# Altium PCB PCB.pcbdoc
Units mil, origin at the board's own origin, x right, y up, seen from the top; angles counter-clockwise.
Board outline 4240.23 x 2862.2 mil, 2 copper layers (Top Layer, Bottom Layer); 24 components, 39 nets, 138 pads, 0 vias.
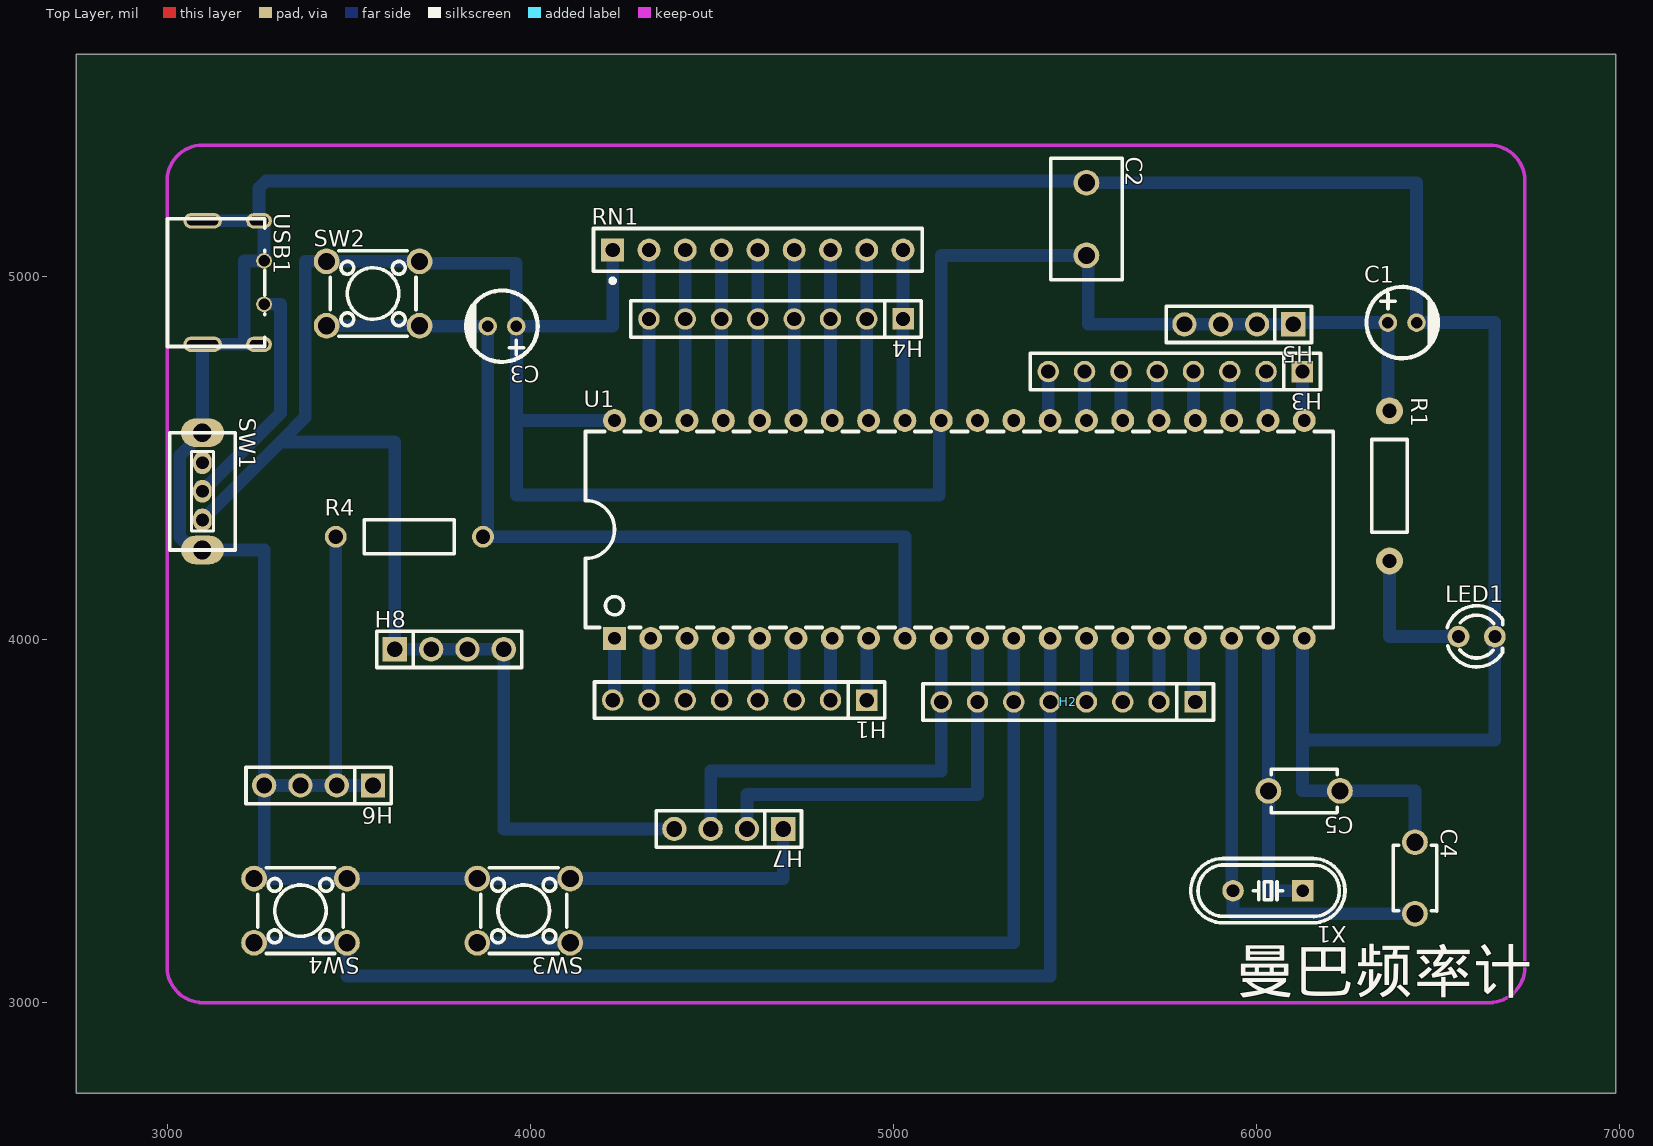
[diagram p0: Top Layer view]
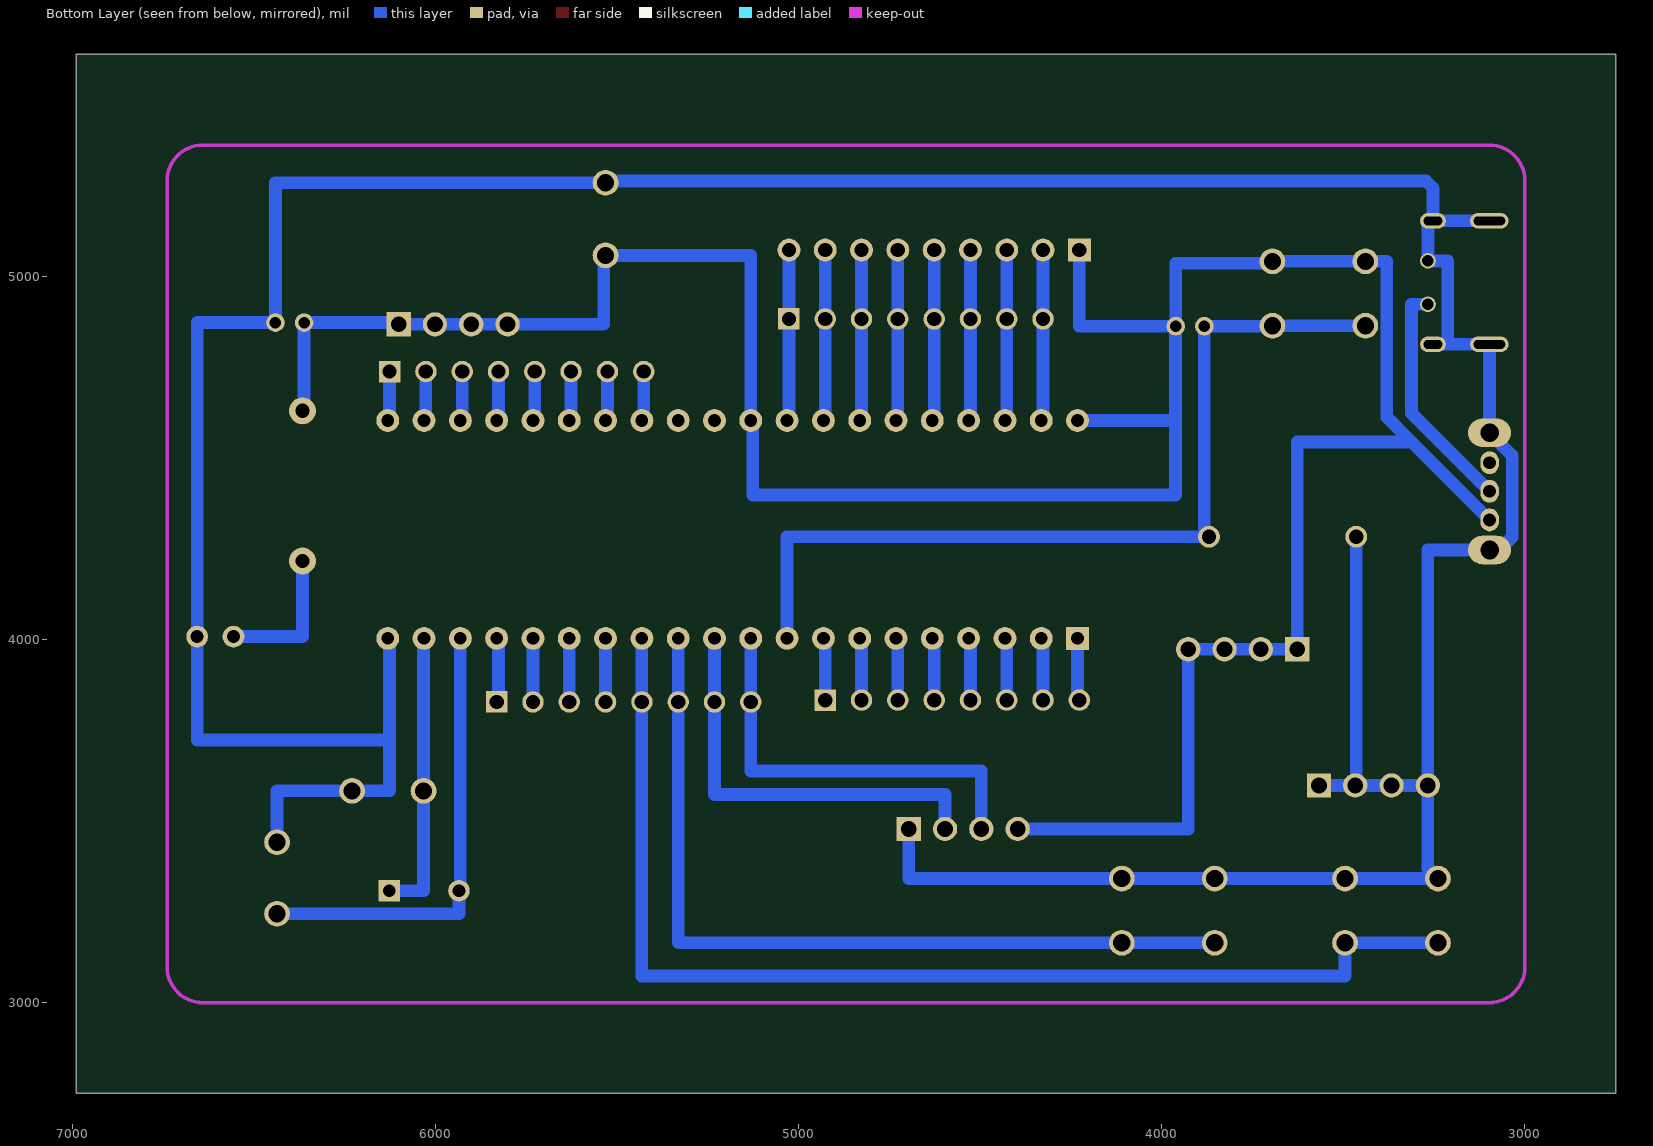
[diagram p1: Bottom Layer view, seen from below]

## Layer stack, top to bottom
Top Layer: signal copper (thickness not stored)
Dielectric: dielectric 12.6, FR-4, Dk 4.8
Bottom Layer: signal copper (thickness not stored)

## Board outline
6990.23,2750 2750,2750 2750,5612.2 6990.23,5612.2

## Design rules (kind name [scope] priority, off if disabled: settings)
BoardOutlineClearance copperThickness1oz [All] p0: genericclearance=10 ignorepadtopadclearanceinfootprint=FALSE except(0: Arc-SplitContinuation Track-SplitContinuation SMDPad-SplitContinuation THPad-SplitContinuation Via-SplitContinuation Fill-SplitContinuation Poly-SplitContinuation Region-SplitContinuation Text-SplitContinuation; 6: SMDPad-CutoutEdge THPad-CutoutEdge Via-CutoutEdge Fill-CutoutEdge Region-CutoutEdge; 11.8: Track-OutlineEdge SMDPad-OutlineEdge THPad-OutlineEdge Via-OutlineEdge Fill-OutlineEdge Region-OutlineEdge Poly-OutlineEdge Text-OutlineEdge Track-CutoutEdge)
BoardOutlineClearance copperThickness2oz [All] p0: genericclearance=10 ignorepadtopadclearanceinfootprint=FALSE except(0: Arc-SplitContinuation Track-SplitContinuation SMDPad-SplitContinuation THPad-SplitContinuation Via-SplitContinuation Fill-SplitContinuation Poly-SplitContinuation Region-SplitContinuation Text-SplitContinuation; 6: Track-CutoutEdge SMDPad-CutoutEdge THPad-CutoutEdge Via-CutoutEdge Region-CutoutEdge; 11.8: Track-OutlineEdge SMDPad-OutlineEdge THPad-OutlineEdge Via-OutlineEdge Fill-OutlineEdge Region-OutlineEdge Poly-OutlineEdge Text-OutlineEdge Fill-CutoutEdge)
Clearance copperThickness1oz [(InNet('+5V') OR InNet('GND') OR InNet('RST') OR InNet('X2') OR InNet('X1') OR InNet('P1.7') OR InNet('P1.6') OR InNet('P1.5') OR InNet('P1.4') OR InNet('P1.3') OR InNet('P1.2') OR InNet('P1.1') OR InNet('P1.0') OR InNet('P3.7') OR InNet('P3.6') OR InNet('P3.5') OR InNet('P3.4') OR InNet('P3.3') OR InNet('P3.2') OR InNet('TXD') OR InNet('RXD') OR InNet('P2.0') OR InNet('P2.1') OR InNet('P2.2') OR InNet('P2.3') OR InNet('P2.4') OR InNet('P2.5') OR InNet('P2.6') OR InNet('P2.7') OR InNet('P0.7') OR InNet('P0.6') OR InNet('P0.5') OR InNet('P0.4') OR InNet('P0.3') OR InNet('P0.2') OR InNet('P0.1') OR InNet('P0.0') OR InNet('$3N2977') OR InNet('VCC'))] p1: gap=7 ignorepadtopadclearanceinfootprint=FALSE except(4: Track-Track; 6: Track-SMDPad SMDPad-SMDPad Track-THPad SMDPad-THPad THPad-THPad Track-Via SMDPad-Via THPad-Via Via-Via Track-Fill SMDPad-Fill THPad-Fill Via-Fill Fill-Fill SMDPad-Region THPad-Region Via-Region Fill-Region Region-Region Track-Poly SMDPad-Poly THPad-Poly Via-Poly Fill-Poly Poly-Poly Track-Text SMDPad-Text THPad-Text Via-Text Fill-Text Region-Text Poly-Text Text-Text; 6.9: Track-Hole SMDPad-Hole THPad-Hole Via-Hole Fill-Hole Region-Hole Poly-Hole Text-Hole Sheet-Hole; 11.8: Track-Region Region-Poly Track-Sheet SMDPad-Sheet THPad-Sheet Via-Sheet Fill-Sheet Region-Sheet Poly-Sheet Text-Sheet)
Clearance copperThickness2oz [All] p1: gap=7 ignorepadtopadclearanceinfootprint=FALSE except(6: Track-SMDPad SMDPad-SMDPad Track-THPad SMDPad-THPad THPad-THPad Track-Via SMDPad-Via THPad-Via Via-Via SMDPad-Fill THPad-Fill Via-Fill Fill-Fill Track-Region SMDPad-Region THPad-Region Via-Region Region-Region Track-Poly SMDPad-Poly THPad-Poly Via-Poly Fill-Poly Region-Poly Poly-Poly Track-Text SMDPad-Text THPad-Text Via-Text Fill-Text Region-Text Poly-Text Text-Text; 6.9: Track-Hole SMDPad-Hole THPad-Hole Via-Hole Fill-Hole Region-Hole Poly-Hole Text-Hole Sheet-Hole; 8: Track-Track; 11.8: Track-Fill Fill-Region Track-Sheet SMDPad-Sheet THPad-Sheet Via-Sheet Fill-Sheet Region-Sheet Poly-Sheet Text-Sheet)
DiffPairsRouting differentialPair [All] p1: maxuncoupledlength=10 minlimit=5.9843 maxlimit=5.9843 mostfreqgap=5.9843 toplayer_minwidth=5 toplayer_prefwidth=10 toplayer_maxwidth=100 bottomlayer_minwidth=5 bottomlayer_prefwidth=10 bottomlayer_maxwidth=100
PasteMaskExpansion pasteMaskExpansion [All] p1: expansion=0
PlaneConnect innerPlane [All] p1: planeconnectstyle=Relief reliefexpansion=20 reliefentries=4 reliefconductorwidth=10 reliefairgap=10
PolygonConnect copperRegion [All] p1: connectstyle=Relief reliefentries=4 reliefconductorwidth=10 polygonreliefangle="90 Angle" airgapwidth=10
RoutingVias viaSize [All] p1: viastyle="Through Hole" holewidth=12.0078 minholewidth=11.811 maxholewidth=248.0316 width=75 minwidth=75 maxwidth=75
SolderMaskExpansion solderMaskExpansion [All] p1: useseparateexpansions=TRUE expansion=2.0079 expansionbottom=2.0079
Width copperThickness1oz [All] p1: maxlimit=35 minlimit=35 preferedwidth=35
Width copperThickness2oz [All] p1: maxlimit=100 minlimit=8 preferedwidth=10

## Components (designator, comment, footprint, x,y, rotation, side; value= is the part's Value field where it differs from the comment)
C1 "" CAP-TH_BD5.0-P2.00-D0.8-FD 6402.36,4873.37 r0 top
C2 "" CAP-TH_L8.5-W5.0-P5.00-D1.2 5532.36,5158.37 r270 top
C3 "" CAP-TH_BD5.0-P2.00-D0.8-FD 3922.36,4863.37 r180 top
C4 "" CAP-TH_L4.5-W3.0-P5.00-D1.2 6437.36,3343.37 r270 top
C5 "" CAP-TH_L4.5-W3.0-P5.00-D1.2 6132.36,3583.37 r180 top
H1 "" HDR-TH_8P-P2.54-V-M 4577.36,3833.37 r180 top
H2 "" HDR-TH_8P-P2.54-V-M 5482.36,3828.37 r180 top
H3 "" HDR-TH_8P-P2.54-V-M 5777.36,4738.37 r180 top
H4 "" HDR-TH_8P-P2.54-V-M 4677.36,4883.37 r180 top
H5 "" HDR-TH_4P-P2.54-V-M 5952.36,4868.37 r180 top
H6 "" HDR-TH_4P-P2.54-V-M 3417.36,3598.37 r180 top
H7 "" HDR-TH_4P-P2.54-V-M 4547.36,3478.37 r180 top
H8 "" HDR-TH_4P-P2.54-V-M 3777.36,3973.37 r0 top
LED1 "" LED-TH_BD3.0-P2.54-FD 6607.36,4008.37 r0 top
R1 "" RES-TH_BD2.5-L6.5-P10.50-D0.6 6367.36,4423.37 r270 top
R4 "" RES-TH_BD2.4-L6.3-P10.30-D0.6 3667.36,4283.37 r0 top
RN1 "" RES-ARRAY-TH_9P-P2.54-D1.0 4627.36,5073.37 r0 top
SW1 "" SW-TH_SS-12D02-VG4 3097.36,4408.37 r270 top
SW2 "" SW-TH_4P-L6.0-W6.0-P4.50-LS6.5 3567.36,4953.37 r0 top
SW3 "" SW-TH_4P-L6.0-W6.0-P4.50-LS6.5 3982.36,3253.37 r180 top
SW4 "" SW-TH_4P-L6.0-W6.0-P4.50-LS6.5 3367.36,3253.37 r180 top
U1 "" DIP-40_L52.0-W13.7-P2.54-LS15.2-BL 5182.36,4303.37 r0 top
USB1 "" USB-C-TH_TYPE-C-31-M-33 3182.36,4983.37 r270 top
X1 "" HC-49US_L11.5-W4.5-P4.88 6032.36,3308.37 r180 top

## Footprints (in the part's own frame and the unit in brackets; to place one, negate y for a bottom-side part, rotate by r counter-clockwise, add the part's x,y. Pads: shape width x height; smd on the part's side, far side on the other; paste and mask are expansions set on the pad)
CAP-TH_BD5.0-P2.00-D0.8-FD [mm]
  round 1.3 hole 0.8: 1(-1,0) 2(1,0)
  silkscreen extent -2.5,-2.5 2.5,2.5
CAP-TH_L4.5-W3.0-P5.00-D1.2 [mm]
  round 1.8 hole 1.2: 1(-2.5,0) 2(2.5,0)
  silkscreen extent -2.3,-1.52 2.31,1.52
CAP-TH_L8.5-W5.0-P5.00-D1.2 [mm]
  round 1.8 hole 1.2: 1(-2.54,0) 2(2.54,0)
  silkscreen extent -4.25,-2.5 4.25,2.5
DIP-40_L52.0-W13.7-P2.54-LS15.2-BL [mil]
  rect 63x63 hole 35: 1(-950,-300)
  round 63 hole 35: 2(-850,-300) 3(-750,-300) 4(-650,-300) 5(-550,-300) 6(-450,-300) 7(-350,-300) 8(-250,-300) 9(-150,-300) 10(-50,-300) 11(50,-300) 12(150,-300) 13(250,-300) 14(350,-300) 15(450,-300) 16(550,-300) 17(650,-300) 18(750,-300) 19(850,-300) 20(950,-300) 21(950,300) 22(850,300) 23(750,300) 24(650,300) 25(550,300) 26(450,300) 27(350,300) 28(250,300) 29(150,300) 30(50,300) 31(-50,300) 32(-150,300) 33(-250,300) 34(-350,300) 35(-450,300) 36(-550,300) 37(-650,300) 38(-750,300) 39(-850,300) 40(-950,300)
  silkscreen extent -1030,-270 1030,270
HC-49US_L11.5-W4.5-P4.88 [mm]
  rect 1.5x1.5 hole 0.9: 1(-2.44,0)
  round 1.5 hole 0.9: 2(2.44,0)
  silkscreen extent -5.39,-2.25 5.39,2.25
HDR-TH_4P-P2.54-V-M [mm]
  rect 1.7x1.7 hole 1.1: 1(-3.81,0)
  round 1.7 hole 1.1: 2(-1.27,0) 3(1.27,0) 4(3.81,0)
  silkscreen extent -5.08,-1.27 5.08,1.27
HDR-TH_8P-P2.54-V-M [mm]
  rect 1.5x1.5 hole 1: 1(-8.89,0)
  round 1.5 hole 1: 2(-6.35,0) 3(-3.81,0) 4(-1.27,0) 5(1.27,0) 6(3.81,0) 7(6.35,0) 8(8.89,0)
  silkscreen extent -10.16,-1.27 10.16,1.27
LED-TH_BD3.0-P2.54-FD [mil]
  round 60 hole 36: 1(-50,0) 2(50,0)
  silkscreen extent -81,-84 72,85
RES-ARRAY-TH_9P-P2.54-D1.0 [mm]
  rect 1.6x1.6 hole 1: 1(-10.16,0)
  round 1.6 hole 1: 2(-7.62,0) 3(-5.08,0) 4(-2.54,0) 5(0,0) 6(2.54,0) 7(5.08,0) 8(7.62,0) 9(10.16,0)
  silkscreen extent -11.5,-2.31 11.5,1.5
RES-TH_BD2.4-L6.3-P10.30-D0.6 [mil]
  round 60 hole 39.37: 1(-202.76,0) 2(202.76,0)
  silkscreen extent -124,-47 124,47
RES-TH_BD2.5-L6.5-P10.50-D0.6 [mil]
  round 74 hole 39.37: 1(-206.69,0) 2(206.69,0)
  silkscreen extent -128,-49 128,49
SW-TH_4P-L6.0-W6.0-P4.50-LS6.5 [mm]
  round 1.8 hole 1.2: 1(-3.25,2.25) 2(3.25,2.25) 3(-3.25,-2.25) 4(3.25,-2.25)
  silkscreen extent -3,-3 3,3
SW-TH_SS-12D02-VG4 [mm]
  oval 1.6x1.3 hole 0.9: 1(-2,0) 2(-0.007,0) 3(2,0)
  oval 2x3 hole 1.3: 4(4.1,0) 5(-4.1,0)
  silkscreen extent -4.1,-2.29 4.1,2.29
USB-C-TH_TYPE-C-31-M-33 [mm]
  oval 1.1x1.8 hole 0.6 slot 1.3 at 90 deg: 3(4.32,1.8) 6(-4.32,1.8)
  oval 1.1x2.7 hole 0.6 slot 2.2 at 90 deg: 4(4.32,-2.15) 5(-4.32,-2.15)
  round 1.1 hole 0.8: A9(1.52,2.15) B12(-1.52,2.15)
  silkscreen extent -4.47,-4.6 4.47,2.2

## Nets (pads, with @x,y where several pads share a name; then routed paths per layer and width w, separated by ;. In a path a pad name is that pad's centre, name@x,y a point inside that pad or via, vN(x,y) a via of type N, cw(c..) or ccw(c..) an arc to the next point about the centre after c; other vN are vias at no path point)
$3N2977: LED1.1 R1.2 | length 398.3
  Bottom Layer w35: R1.2 6367.36,4008.37 LED1.1
+5V: C1.1 C2.2 C3.1 H5.1 H5.2 H5.3 H5.4 H7.4 H8.1 H8.2 H8.3 H8.4 R1.1 RN1.1 SW1.3 SW2.1 SW2.2 U1.31 U1.40 | length 8433.6
  Bottom Layer w35: SW1.3 3312.36,4544.63 ; RN1.1 4227.36,4863.37 C3.1 ; U1.40 3962.36,4603.37 ; H7.4 3927.36,3478.37 H8.4 H8.3 H8.2 H8.1 3627.36,4544.63 3312.36,4544.63 ; U1.31@5127.36,4598.37 5127.36,4398.37 3962.36,4398.37 3962.36,4603.37 ; U1.31 5132.36,5058.37 C2.2 5537.36,5053.37 5537.36,4868.37 H5.4 H5.3 H5.2 H5.1 6107.36,4873.37 C1.1 6362.99,4634.43 R1.1 ; 3312.36,4544.63 3380.31,4612.58 3380.31,5041.95 SW2.1 SW2.2 3700.31,5036.95 3961.73,5036.95 C3.1 ; C3.1 3962.36,4862.74 3962.36,4603.37
GND: C1.2 C2.1 C4.1 C5.1 H6.1 H6.2 H6.3 H6.4 H7.1 LED1.2 R4.1 SW1.4 SW1.5 SW3.3 SW3.4 SW4.3 SW4.4 U1.20 USB1.3 USB1.4 USB1.5 USB1.6 USB1.B12 | length 11424
  Bottom Layer w35: USB1.5 USB1.6 ; USB1.3 3212.36,4813.29 ; R4.1 3464.6,3601.13 H6.2 ; H6.1 H6.2 ; H7.1 4697.36,3341.95 SW3.3 SW3.4 SW4.3 SW4.4 3267.36,3369.9 H6.4 ; C2.1@5522.36,5263.37 3272.36,5263.37 3253.23,5244.24 USB1.6 ; C2.1 6441.73,5258.37 C1.2 6657.36,4873.37 LED1.2 6657.36,3723.37 6147.36,3723.37 ; U1.20 6127.36,3998.37 6127.36,3583.37 C5.1 6437.36,3583.37 C4.1 ; 3212.36,4813.29 3212.36,5043.21 USB1.B12 3267.01,5139.67 USB1.6 ; 3212.36,4813.29 USB1.4 3097.36,4812.94 SW1.5 3035.2,4507.63 3035.2,4281.95 3070.2,4246.95 SW1.4 3267.36,4246.95 H6.4 ; H6.4 H6.3 H6.2
P0.0: H4.8 RN1.2 U1.39 | length 475
  Bottom Layer w35: U1.39@4327.36,4598.37 H4.8 RN1.2
P0.1: H4.7 RN1.3 U1.38 | length 475
  Bottom Layer w35: U1.38@4427.36,4598.37 H4.7 RN1.3
P0.2: H4.6 RN1.4 U1.37 | length 475
  Bottom Layer w35: U1.37@4527.36,4598.37 H4.6 RN1.4
P0.3: H4.5 RN1.5 U1.36 | length 475
  Bottom Layer w35: U1.36@4627.36,4598.37 H4.5 RN1.5
P0.4: H4.4 RN1.6 U1.35 | length 475
  Bottom Layer w35: U1.35@4727.36,4598.37 H4.4 RN1.6
P0.5: H4.3 RN1.7 U1.34 | length 475
  Bottom Layer w35: U1.34@4827.36,4598.37 H4.3 RN1.7
P0.6: H4.2 RN1.8 U1.33 | length 475
  Bottom Layer w35: U1.33@4927.36,4598.37 H4.2 RN1.8
P0.7: H4.1 RN1.9 U1.32 | length 475
  Bottom Layer w35: U1.32@5027.36,4598.37 H4.1 RN1.9
P1.0: H1.8 U1.1 | length 172.1
  Bottom Layer w35: H1.8 4232.36,3838.37 U1.1
P1.1: H1.7 U1.2 | length 165
  Bottom Layer w35: H1.7 U1.2@4327.36,3998.37
P1.2: H1.6 U1.3 | length 165
  Bottom Layer w35: H1.6 U1.3@4427.36,3998.37
P1.3: H1.5 U1.4 | length 165
  Bottom Layer w35: H1.5 U1.4@4527.36,3998.37
P1.4: H1.4 U1.5 | length 165
  Bottom Layer w35: H1.4 U1.5@4627.36,3998.37
P1.5: H1.3 U1.6 | length 165
  Bottom Layer w35: H1.3 U1.6@4727.36,3998.37
P1.6: H1.2 U1.7 | length 165
  Bottom Layer w35: H1.2 U1.7@4827.36,3998.37
P1.7: H1.1 U1.8 | length 165
  Bottom Layer w35: H1.1 U1.8@4927.36,3998.37
P2.0: H3.1 U1.21 | length 137.1
  Bottom Layer w35: H3.1 6127.36,4608.37 U1.21
P2.1: H3.2 U1.22 | length 137.1
  Bottom Layer w35: H3.2 6027.36,4608.37 U1.22
P2.2: H3.3 U1.23 | length 150
  Bottom Layer w35: U1.23@5927.36,4598.37 H3.3@5927.36,4748.37
P2.3: H3.4 U1.24 | length 150
  Bottom Layer w35: U1.24@5827.36,4598.37 H3.4@5827.36,4748.37
P2.4: H3.5 U1.25 | length 150
  Bottom Layer w35: U1.25@5727.36,4598.37 H3.5@5727.36,4748.37
P2.5: H3.6 U1.26 | length 150
  Bottom Layer w35: U1.26@5627.36,4598.37 H3.6@5627.36,4748.37
P2.6: H3.7 U1.27 | length 150
  Bottom Layer w35: U1.27@5527.36,4598.37 H3.7@5527.36,4748.37
P2.7: H3.8 U1.28 | length 150
  Bottom Layer w35: U1.28@5427.36,4598.37 H3.8@5427.36,4748.37
P3.2: H2.6 SW3.1 SW3.2 U1.12 | length 2298.6
  Bottom Layer w35: SW3.2 SW3.1 5332.36,3164.79 H2.6 ; U1.12@5327.36,3998.37 5332.36,3993.37 H2.6@5332.36,3843.37
P3.3: H2.5 SW4.1 SW4.2 U1.13 | length 3207.5
  Top Layer w35: SW4.1@3487.61,3164.79 3487.61,3168.62 SW4.1@3492.36,3173.37
  Bottom Layer w35: SW4.2 SW4.1 3495.31,3073.11 5432.36,3073.11 H2.5 ; U1.13@5427.36,3998.37 5432.36,3993.37 H2.5@5432.36,3843.37
P3.4: H2.4 U1.14 | length 157.1
  Bottom Layer w35: U1.14@5527.36,3998.37 5532.36,3993.37 H2.4@5532.36,3843.37
P3.5: H2.3 U1.15 | length 157.1
  Bottom Layer w35: U1.15@5627.36,3998.37 5632.36,3993.37 H2.3@5632.36,3843.37
P3.6: H2.2 U1.16 | length 157.1
  Bottom Layer w35: U1.16@5727.36,3998.37 5732.36,3993.37 H2.2@5732.36,3843.37
P3.7: H2.1 U1.17 | length 172.1
  Bottom Layer w35: U1.17@5827.36,3998.37 5827.36,3833.37 H2.1
RST: C3.2 R4.2 SW2.3 SW2.4 U1.9 | length 2471.7
  Bottom Layer w35: SW2.3 SW2.4 3696.73,4863.37 C3.2 3882.99,4296.24 R4.2 5032.36,4283.37 U1.9
RXD: H2.8 H7.3 U1.10 | length 1142.1
  Bottom Layer w35: H7.3 4497.36,3638.37 5132.36,3638.37 H2.8 ; U1.10@5127.36,3998.37 5132.36,3993.37 H2.8@5132.36,3843.37
TXD: H2.7 H7.2 U1.11 | length 1142.1
  Bottom Layer w35: H7.2 4597.36,3573.37 5232.36,3573.37 H2.7 ; U1.11@5227.36,3998.37 5232.36,3993.37 H2.7@5232.36,3843.37
VCC: SW1.2 USB1.A9 | length 649
  Bottom Layer w35: SW1.2 3312.15,4623.41 3312.15,4923.52 USB1.A9
X1: C5.2 U1.19 X1.1 | length 787.2
  Bottom Layer w35: U1.19@6027.36,3998.37 6033.94,3991.79 C5.2 6033.94,3308.37 X1.1
X2: C4.2 U1.18 X1.2 | length 1261.1
  Bottom Layer w35: U1.18 5932.36,3312.31 X1.2 5936.3,3244.94 C4.2
pads on no net: SW1.1 U1.29 U1.30

## Keep-outs
Board Outline Layer:
  lines w10: 3000.07,3098.43 ccw(c3098.49,3098.43) 3098.49,3000 6641.8,3000 ccw(c6641.8,3098.43) 6740.23,3098.43 6740.23,5263.78 ccw(c6641.8,5263.78) 6641.8,5362.2 3098.49,5362.2 ccw(c3098.49,5263.78) 3000.07,5263.78 3000.07,3098.43

## Silkscreen, mask and mechanical layers (free items; w line width, h text height)
Top Silkscreen Layer:
  text "曼巴频率计" at 5942.36,3028.37 h120